# Altium PCB SD171-6.0PCB4.PcbDoc (part 2 of 11)
Units mil, origin at the board's own origin, x right, y up, seen from the top; angles counter-clockwise.
Board outline 5995 x 3921.26 mil, 6 copper layers (Top Layer, GND, Mid-Layer 1, Mid-Layer 2, VCC, Bottom Layer); 477 components, 539 nets, 2143 pads, 1050 vias.
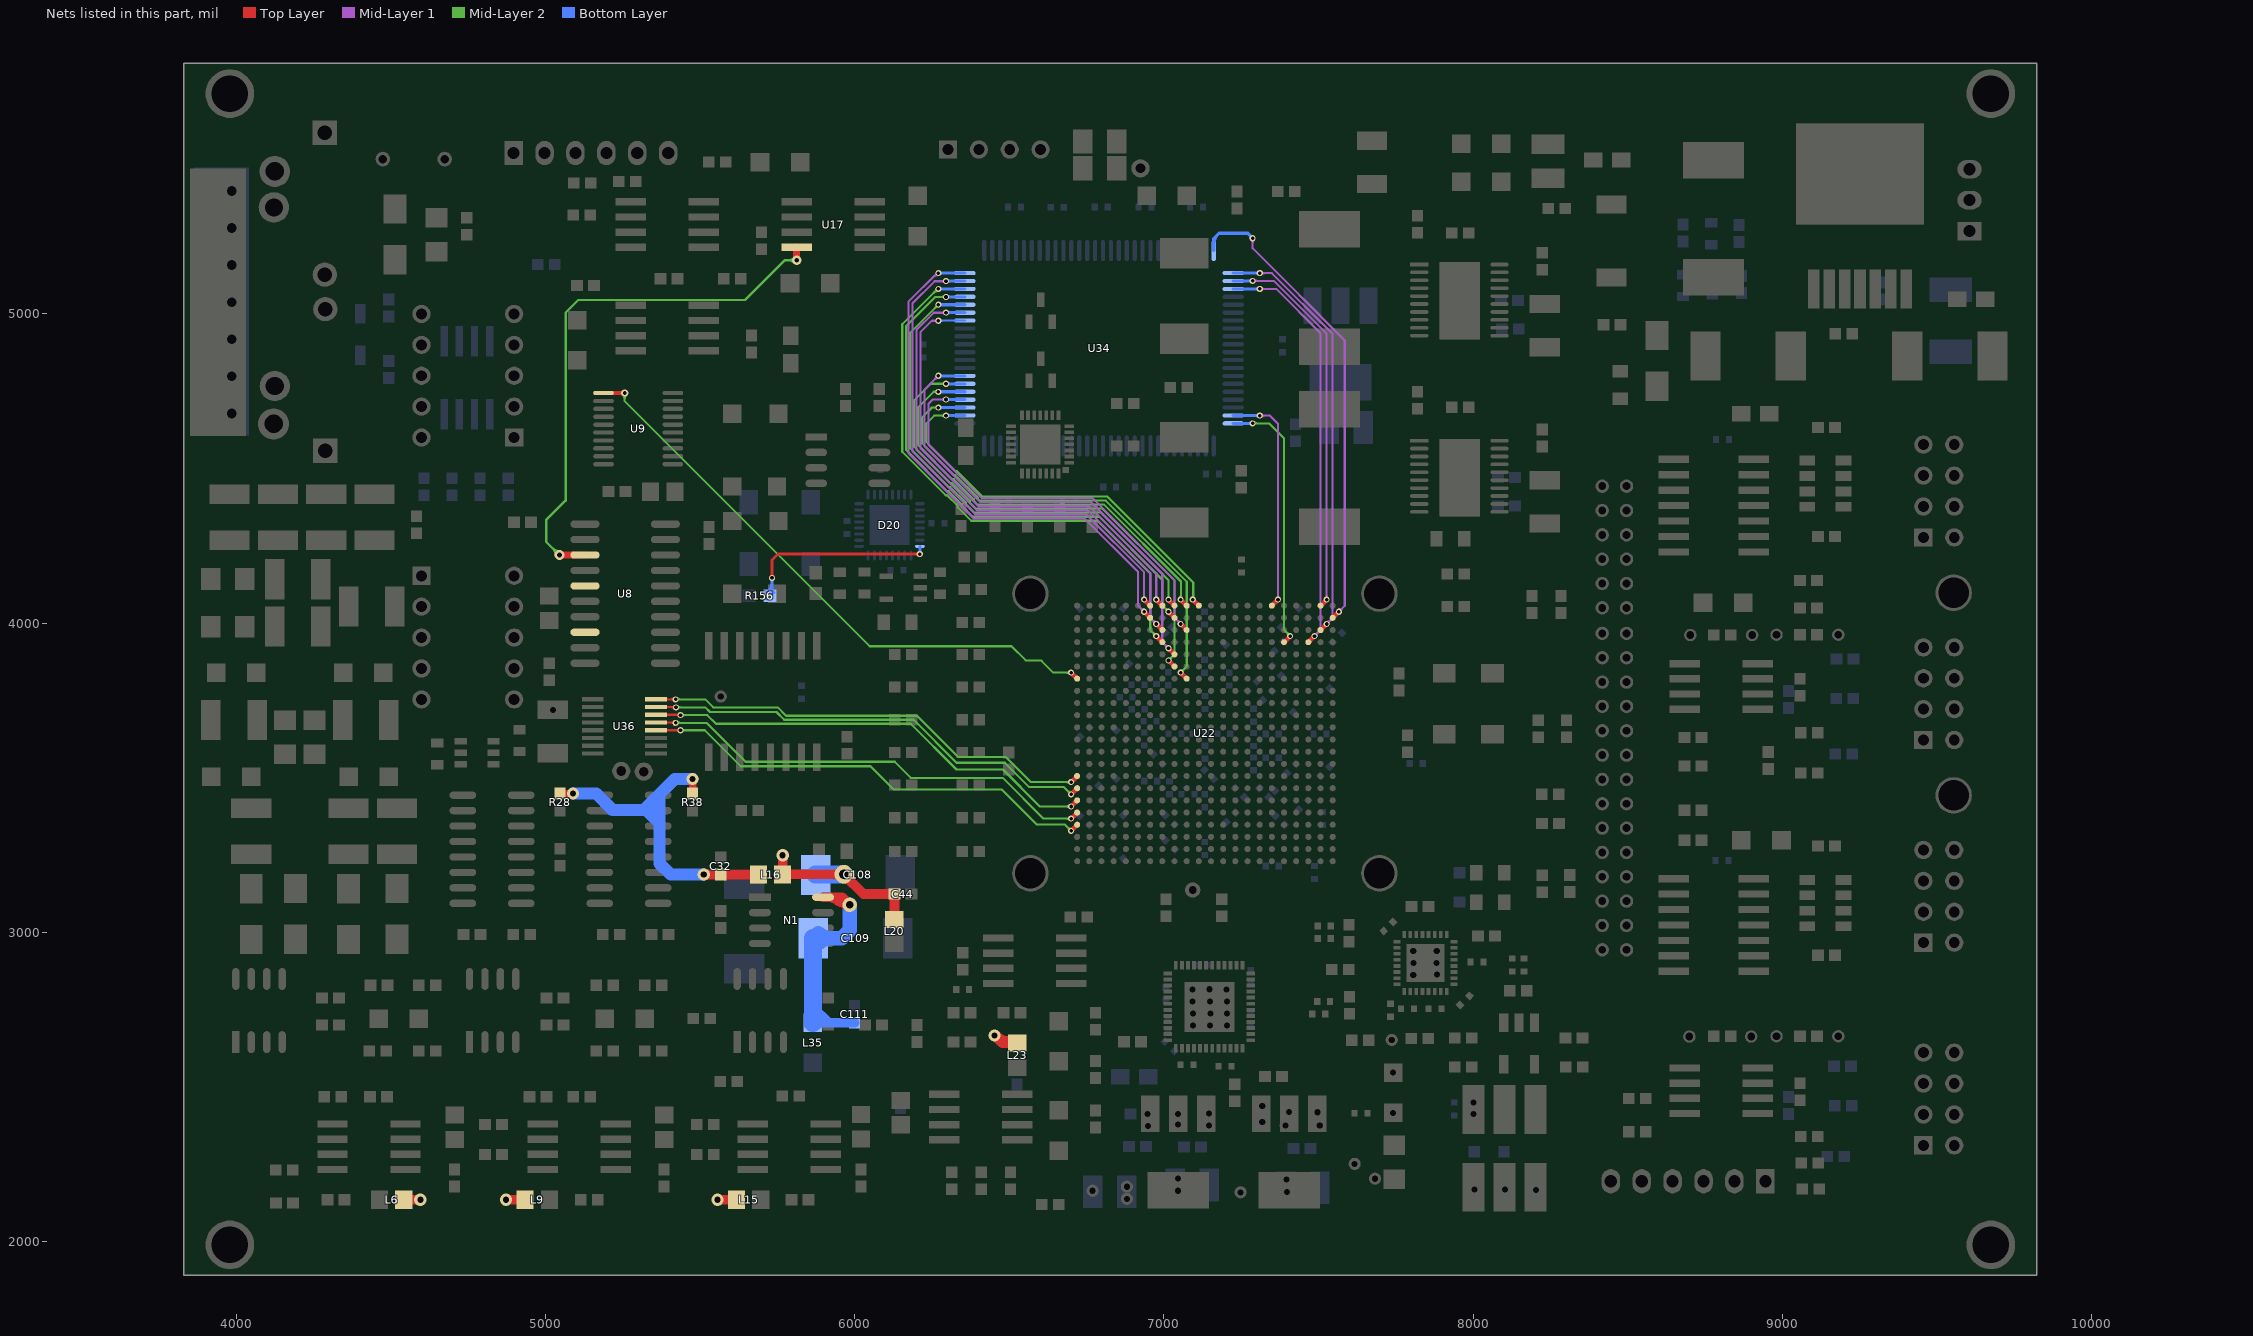
[diagram p6: the nets of this part, all layers, seen from the top]

## Footprints (in the part's own frame and the unit in brackets; to place one, negate y for a bottom-side part, rotate by r counter-clockwise, add the part's x,y. Pads: shape width x height; smd on the part's side, far side on the other; paste and mask are expansions set on the pad) (continued)
MTC20_N [mm] "TSOP, 20-Leads, Body 6.5x4.4mm, Pitch 0.65mm, IPC Medium Density"
  oval 1.7x0.35 smd: 1(-2.85,2.925) 2(-2.85,2.275) 3(-2.85,1.625) 4(-2.85,0.975) 5(-2.85,0.325) 6(-2.85,-0.325) 7(-2.85,-0.975) 8(-2.85,-1.625) 9(-2.85,-2.275) 10(-2.85,-2.925) 11(2.85,-2.925) 12(2.85,-2.275) 13(2.85,-1.625) 14(2.85,-0.975) 15(2.85,-0.325) 16(2.85,0.325) 17(2.85,0.975) 18(2.85,1.625) 19(2.85,2.275) 20(2.85,2.925)
  silkscreen extent -2.98,-3.3 1.6,3.77, body extent -2.25,-3.3 2.25,3.3, height 1.1
N10A [mm] "DIP; 10 Leads; Row Spacing 7.62 mm; Pitch 2.54 mm"
  rect 1.5x1.5 hole 0.9: 1(-3.81,5.08)
  round 1.5 hole 0.9: 2(-3.81,2.54) 3(-3.81,0) 4(-3.81,-2.54) 5(-3.81,-5.08) 6(3.81,-5.08) 7(3.81,-2.54) 8(3.81,0) 9(3.81,2.54) 10(3.81,5.08)
  silkscreen extent -3.94,-7.25 2.65,7.25, body extent -3.25,-7.25 3.25,7.25, height 5.08
NS020_N [mm] "20-Pin Small Outline Package 1.27 mm Pitch, IPC Medium Density"
  oval 2.4x0.6 smd: 1(-3.3,5.715) 2(-3.3,4.445) 3(-3.3,3.175) 4(-3.3,1.905) 5(-3.3,0.635) 6(-3.3,-0.635) 7(-3.3,-1.905) 8(-3.3,-3.175) 9(-3.3,-4.445) 10(-3.3,-5.715) 11(3.3,-5.715) 12(3.3,-4.445) 13(3.3,-3.175) 14(3.3,-1.905) 15(3.3,-0.635) 16(3.3,0.635) 17(3.3,1.905) 18(3.3,3.175) 19(3.3,4.445) 20(3.3,5.715)
  silkscreen extent -3.42,-6.45 1.7,6.69, body extent -2.8,-6.45 2.8,6.45, height 2
OPT [mm]
  rect 1.5x1.5 hole 0.9: 1(3.81,1.27)
  round 1.5 hole 0.9: 2(1.27,1.27) 3(-1.27,1.27) 4(-3.81,1.27) 5(-3.81,-1.27) 6(-1.27,-1.27) 7(1.27,-1.27) 8(3.81,-1.27)
  silkscreen extent -6.35,-22.12 6.35,5.08
PIN1 [mm] "Connector; Plug"
  round 2.5 hole 1.5: 1(0,0)
  silkscreen extent -1.4,-1.4 1.4,2.17
PIN-W2/E2.8 [mm] "Thru-Hole; 2 Leads"
  rect 2x2 hole 1.2: 1(-5.825,0)
  round 2 hole 1.2: 2(5.825,0)
  silkscreen extent -2.65,-1.4 2.65,1.4
QFG32_N [mm] "QFN, 32-Leads, Body 5x5mm, Pitch 0.5mm, IPC Medium Density"
  oval 0.8x0.25 smd: 1(-2.5,1.75) 2(-2.5,1.25) 3(-2.5,0.75) 4(-2.5,0.25) 5(-2.5,-0.25) 6(-2.5,-0.75) 7(-2.5,-1.25) 8(-2.5,-1.75) 17(2.5,-1.75) 18(2.5,-1.25) 19(2.5,-0.75) 20(2.5,-0.25) 21(2.5,0.25) 22(2.5,0.75) 23(2.5,1.25) 24(2.5,1.75)
  oval 0.25x0.8 smd: 9(-1.75,-2.5) 10(-1.25,-2.5) 11(-0.75,-2.5) 12(-0.25,-2.5) 13(0.25,-2.5) 14(0.75,-2.5) 15(1.25,-2.5) 16(1.75,-2.5) 25(1.75,2.5) 26(1.25,2.5) 27(0.75,2.5) 28(0.25,2.5) 29(-0.25,2.5) 30(-0.75,2.5) 31(-1.25,2.5) 32(-1.75,2.5)
  rect 3.3x3.3 smd: 33(0,0)
  silkscreen extent -3.58,-2.6 2.6,2.6, body extent -2.58,-2.58 2.58,2.58, height 1
QFP65P1680X2280-100N [mm] "100-Pin Quad Flat Pack Rectangular 0.65 mm Pitch"
  oval 1.75x0.35 smd: 1(-8.025,9.425) 2(-8.025,8.775) 3(-8.025,8.125) 4(-8.025,7.475) 5(-8.025,6.825) 6(-8.025,6.175) 7(-8.025,5.525) 8(-8.025,4.875) 9(-8.025,4.225) 10(-8.025,3.575) 11(-8.025,2.925) 12(-8.025,2.275) 13(-8.025,1.625) 14(-8.025,0.975) 15(-8.025,0.325) 16(-8.025,-0.325) 17(-8.025,-0.975) 18(-8.025,-1.625) 19(-8.025,-2.275) 20(-8.025,-2.925) 21(-8.025,-3.575) 22(-8.025,-4.225) 23(-8.025,-4.875) 24(-8.025,-5.525) 25(-8.025,-6.175) 26(-8.025,-6.825) 27(-8.025,-7.475) 28(-8.025,-8.125) 29(-8.025,-8.775) 30(-8.025,-9.425) 51(8.025,-9.425) 52(8.025,-8.775) 53(8.025,-8.125) 54(8.025,-7.475) 55(8.025,-6.825) 56(8.025,-6.175) 57(8.025,-5.525) 58(8.025,-4.875) 59(8.025,-4.225) 60(8.025,-3.575) 61(8.025,-2.925) 62(8.025,-2.275) 63(8.025,-1.625) 64(8.025,-0.975) 65(8.025,-0.325) 66(8.025,0.325) 67(8.025,0.975) 68(8.025,1.625) 69(8.025,2.275) 70(8.025,2.925) 71(8.025,3.575) 72(8.025,4.225) 73(8.025,4.875) 74(8.025,5.525) 75(8.025,6.175) 76(8.025,6.825) 77(8.025,7.475) 78(8.025,8.125) 79(8.025,8.775) 80(8.025,9.425)
  oval 0.35x1.75 smd: 31(-6.175,-11.025) 32(-5.525,-11.025) 33(-4.875,-11.025) 34(-4.225,-11.025) 35(-3.575,-11.025) 36(-2.925,-11.025) 37(-2.275,-11.025) 38(-1.625,-11.025) 39(-0.975,-11.025) 40(-0.325,-11.025) 41(0.325,-11.025) 42(0.975,-11.025) 43(1.625,-11.025) 44(2.275,-11.025) 45(2.925,-11.025) 46(3.575,-11.025) 47(4.225,-11.025) 48(4.875,-11.025) 49(5.525,-11.025) 50(6.175,-11.025) 81(6.175,11.025) 82(5.525,11.025) 83(4.875,11.025) 84(4.225,11.025) 85(3.575,11.025) 86(2.925,11.025) 87(2.275,11.025) 88(1.625,11.025) 89(0.975,11.025) 90(0.325,11.025) 91(-0.325,11.025) 92(-0.975,11.025) 93(-1.625,11.025) 94(-2.275,11.025) 95(-2.925,11.025) 96(-3.575,11.025) 97(-4.225,11.025) 98(-4.875,11.025) 99(-5.525,11.025) 100(-6.175,11.025)
  silkscreen extent -8.15,-9.75 6.75,10.33, body extent -7,-10 7,10, height 3.05
RAD-0.2 [mm] "Radial Cap, Thru-Hole; 2 Leads; 0.2 in Pin Spacing"
  round 1.2 hole 0.7: 1(-2.54,0) 2(2.54,0)
  silkscreen extent -4.44,-1.91 4.44,1.91
RESETKEY [mm]
  rect 1.5x1.5 smd: 0(0,3.937) 0(5.969,0.127) 1(0,0.254) 2(5.969,3.937)
  silkscreen extent 0,0 5.97,4.06
RNS001 [mil]
  rect 32x51 smd: 1(-75,-59) 2(-25,-59) 3(25,-59) 4(75,-59) 5(75,59) 6(25,59) 7(-25,59) 8(-75,59)
  silkscreen extent -122,-61 100,25
SIP3X [mm]
  rect 1.524x2 hole 1: 1(-0.002,0.02)
  oval 1.524x2 hole 1: 2(2.538,0.02) 3(5.078,0.02)
  silkscreen extent -2.54,-2.52 7.62,3.07
SIP6X [mm]
  rect 1.524x2 hole 1: 1(-0.023,0.014)
  oval 1.524x2 hole 1: 2(2.517,0.014) 3(5.057,0.014) 4(7.597,0.014) 5(10.137,0.014) 6(12.677,0.014)
  silkscreen extent -2.56,-2.02 15.22,3.57
SM-22 [mil]
  rect 30x60 smd mask+4: 1(100,0) 2(50,0) 3(0,0) 4(0,135.16) 5(100,135.16)
  silkscreen extent -50,-50 150,185
SMC [mm] "DO-214-AB/SMC; 2 C-Bend Leads; Body 7.9 x 5.9 mm, inc. leads (LxW)"
  rect 2.4x3.3 smd: 1(3.475,0) 2(-3.475,0)
  silkscreen extent -5.07,-2.05 5.43,2.05
SMD8XX [mm]
  rect 2.5x0.6 smd: 1(1.153,4.448) 2(1.153,3.198) 3(1.153,1.948) 4(1.153,0.698) 5(7.153,0.698) 6(7.153,1.948) 7(7.153,3.198) 8(7.153,4.448)
  silkscreen extent 2.93,0 5.34,5.08
SMD14X [mm]
  rect 2.5x0.6 smd: 1(0,0) 2(0,-1.27) 3(0,-2.54) 4(0,-3.81) 5(0,-5.08) 6(0,-6.35) 7(0,-7.62) 8(6.6,-7.62) 9(6.6,-6.35) 10(6.6,-5.08) 11(6.6,-3.81) 12(6.6,-2.54) 13(6.6,-1.27) 14(6.6,0)
  silkscreen extent 1.52,-8.25 5.08,0.64
so_8 [mm]
  rect 1.8x0.6 smd: 1(0,0)
  oval 1.8x0.6 smd: 2(0,-1.27) 3(0,-2.54) 4(0,-3.81) 5(5.188,-3.81) 6(5.188,-2.54) 7(5.188,-1.27) 8(5.188,0)
  silkscreen extent 1.32,-4.44 3.86,0.64
SOIC16 [mm]
  rect 0.6x2.25 smd: 1(0,0) 2(1.27,0) 3(2.54,0) 4(3.81,0) 5(5.08,0) 6(6.35,0) 7(7.62,0) 8(8.89,0) 9(8.89,9.15) 10(7.62,9.15) 11(6.35,9.15) 12(5.08,9.15) 13(3.81,9.15) 14(2.54,9.15) 15(1.27,9.15) 16(0,9.15)
  silkscreen extent -0.98,-0.12 9.72,7.63
SOP16X [mm]
  rect 1.8x0.35 smd: 1(0,0) 2(0,-0.635) 3(0,-1.27) 4(0,-1.905) 5(0,-2.54) 6(0,-3.175) 7(0,-3.81) 8(0,-4.445) 9(5.2,-4.445) 10(5.2,-3.81) 11(5.2,-3.175) 12(5.2,-2.54) 13(5.2,-1.905) 14(5.2,-1.27) 15(5.2,-0.635) 16(5.2,0)
  silkscreen extent 1.27,-4.83 3.81,0.25
SOP20 [mm]
  rect 1.5x0.3 smd: 1(0,0)
  oval 1.5x0.3 smd: 2(0,-0.65) 3(0,-1.3) 4(0,-1.95) 5(0,-2.6) 6(0,-3.25) 7(0,-3.9) 8(0,-4.55) 9(0,-5.2) 10(0,-5.85) 11(6.6,-5.85) 12(6.6,-5.2) 13(6.6,-4.55) 14(6.6,-3.9) 15(6.6,-3.25) 16(6.6,-2.6) 17(6.6,-1.95) 18(6.6,-1.3) 19(6.6,-0.65) 20(6.6,0)
  silkscreen extent 1.58,-6.18 5.02,0.33
SOT23-3L [mm] "SOT23, 3-Leads, Body 2.9x1.3mm, Pitch 0.95mm, Lead Span 2.5mm, IPC High Density"
  rect 1.2x0.6 smd: 1(-0.9,0.95) 2(-0.9,-0.95) 3(0.9,0)
  silkscreen extent -1.02,-1.5 0.7,1.92, body extent -0.7,-1.5 0.7,1.5, height 1.1
SOT23-6 [mm]
  rect 0.55x1 smd: 1(-0.95,-1.35) 2(0,-1.35) 3(0.95,-1.35) 4(0.95,1.35) 5(0,1.35) 6(-0.95,1.35)
  silkscreen extent -1.52,-0.76 1.52,0.76
SOT-223 [mm]
  rect 1.5x3 smd: 1(-2.3,-4.3) 2(0,-4.3) 3(2.3,-4.3)
  rect 5.08x3 smd: 4(0,2)
  silkscreen extent -3.8,-3.6 3.8,0
TS7B_N [mm] "D2-PAK, 8-Leads, Body 8.6x10.2mm, Pitch 1.27mm, Lead Span 14.1mm, IPC Medium Density"
  rect 3.2x0.95 smd: 1(-6,3.81) 2(-6,2.54) 3(-6,1.27) 4(-6,0) 5(-6,-1.27) 6(-6,-2.54) 7(-6,-3.81)
  rect 8.3x10.5 smd: 8(3.45,0)
  silkscreen extent -6.12,-5.2 -1.1,5.2, body extent -3.35,-5.2 6.05,5.2, height 4.64
XTALSMD [mil]
  rect 74x60 smd: 1(0,0) 2(0,-197) 3(156,-197) 4(156,0)
  silkscreen extent -60,-250 216,53

## Part data
C1 C2 C5 C6 C7 C8 C9 C10 C11 C12 C13 C14 C15 C16 C18 C21 C22 C23 C24 C25 C26 C27 C28 C30 C31 C32 C33 C35 C38 C39 C41 C42 C43 C44 C45 C47 C48 C50 C51 C52 C53 C55 C60 C61 C62 C63 C64 C72 C73 C82 C85 C86 C89 C92 C93 C98 C99 C102 C106 C110 C111 C112 C113 C114 C115 C116 C117 C118 C119 C120 C121 C122 C123 C124 C125 C126 C127 C128 C129 C130 C131 C132 C133 C134 C135 C136 C137 C138 C139 C140 C141 C142 C143 C144 C145 C146 C147 C148 C149 C150 C151 C152 C153 C154 C155 C156 C157 C159 C160 C161 C162 C164 C165 C166 C167 C168 C169 C170 C171 C172 C173 C174 C175 C176 C177 C178 C179 C180 C181 C182 C183 C184 C185 C186 C187 C188 C189 C190 C191 C192 C193 C194 C195 C196 C197 C198 C199 C200 C201 C204 C205 C206 C207 C208 C209 C210 C211 C215 C216: library part Cap, "Capacitor"
C19 C20 C34 C36 C37 C87 C90 C94 C95 C96 C97 C100 C101 C212: library part "Cap Semi", "Capacitor (Semiconductor SIM Model)"
C46: library part ELECTRO1
C49 C56 C58 C59 C65 C70 C71 C74 C75 C76 C78 C80 C83 C91 C103 C105 C158 C163 C202 C203 C214 C228: library part CAP, "Capacitor"
C54 C57 C79 C81: library part CAPACITOR, "Capacitor"
C66 C67 C69 C213 C229: library part ELECTRO1, "Electrolytic Capacitor"
C68 C77: library part "Cap Pol1", "Polarized Capacitor (Radial)"
C84 C88 C104 C220: library part CAP+
C107 C108 C109: library part "Capcitor polarity"
C218 C219 C221 C222 C223 C224 C225 C226 C227: library part 2543.S01_104_49
D1 D2 D3 D4 D5 D6: library part Diode, "Default Diode"
D8 D10 D13 D14 D15 D16: library part LED0, "Typical INFRARED GaAs LED"
D9: library part LED2, "Typical RED, GREEN, YELLOW, AMBER GaAs LED"
D11 D12: library part BAV99, "Silicon Switching Diode Array for High-Speed Switching"
D18: library part MAX823, "MAX823复位监控芯片"
D20: library part XC2C32A-6QFG32C, "CoolRunner-II 1.8V, 32 Macrocell CPLD, 21 User I/Os, 32-Pin QFNL, Commercial Grade, Pb-Free"
J3 J4 J5: library part "Header 6", "Header, 6-Pin"
L1 L2 L3 L4 L5 L6 L7 L9 L10 L11 L12 L13 L14 L15 L16 L17 L18 L19 L21 L22 L23 L24 L25 L26 L27 L29 L30 L31 L32 L33 L34 L35: library part Inductor, "Inductor"
L20: library part Inductor
L28: library part INDUCTOR1
N1: library part LM2660
N2 N5: library part LM1117, "LM1117MPX-3.3(NSC)"
N3: "SIMPLE SWITCHER High Efficiency 3A Step-Down Voltage Regulator"
N4: library part LM1117
O1 O3: library part HFBR-1414
O2 O4: library part OPTO
P1: library part "Header 3", "Header, 3-Pin"
P5: library part MHDR2X20, "Header, 20-Pin, Dual row"
Q1 Q2: library part Triac, "Silicon Bidirectional Triode Thyristor"
R1 R3 R4 R5 R7 R8 R9 R12 R13 R14 R15 R16 R17 R18 R19 R20 R21 R22 R23 R24 R26 R27 R28 R29 R30 R31 R32 R33 R34 R35 R36 R37 R38 R39 R40 R41 R43 R45 R46 R47 R48 R49 R50 R51 R53 R55 R56 R58 R60 R61 R62 R63 R64 R65 R66 R67 R68 R69 R70 R71 R72 R74 R75 R77 R78 R80 R81 R85 R86 R87 R88 R89 R90 R92 R93 R94 R95 R96 R97 R98 R99 R100 R101 R102 R103 R104 R105 R106 R115 R116 R118 R119 R120 R121 R122 R123 R132 R133 R134 R135 R136 R137 R138 R139 R140 R141 R142 R143 R146 R151 R152 R153 R154 R155: library part Res2, "Resistor"
R42 R44: library part Resistor
R73 R76 R79 R156 R157 R158 R159 RT1: library part RES2
R107 R108 R109 R110 R111 R112 R113 R114 R117 R124 R125 R126 R127 R128 R129 R130 R131: library part Res3, "Resistor"
R149 R150: library part RES2, "电阻"
RN1 RN2: library part "SW DIP-4", "DIP Switch, 4 Position, SPST"
SW1 SW2: library part SW-PB, "Switch"
T1: library part ETC1_1_13
U1 U6 U15: library part "MCL MSW-2"
U2 U7 U16: library part AD847AQ, "High-Speed, Low-Power Monolithic Operational Amplifier"
U3 U4: library part TQ2SA
U5 U11: library part 74VHC4053M, "Triple 2-Channnel Analog Multiplexer"
U8: "Octal Bus Transceiver with 3-State Outputs"
U9: "Octal Latch with 3-State Output"
U12: library part OP07AJ, "Ultra-Low Offset Voltage Operational Amplifier"
U13: library part REF01AJ, "+10V Precision Voltage Reference"
U14: library part "SPI FLASH 128Mb S25FL128P", "SPI FLASH 128Mbit, 104MHz, 64kB sector"
U17: library part ads1251
U20: library part AD8138
U21: library part RF2906(28), "433MHZ PSK/FM/AM/Data Transceiver"
U22: library part XC6SLX45-L1FGG484I, "Spartan-6 LX 1.0V FPGA, 316 User I/Os, 484-Ball Fine-Pitch BGA (1.0mm Pitch), Low Power Version, Industrial Grade, Pb-Free"
U23: library part AD9246
U24: library part AD9515
U25: library part TPS54312, "TPS54312"
U28: library part "OSC LVPECL"
U29 U30: "Quadruple 2-Input Positive-NAND Gate"
U31 U32 U33: library part ICL7650BCSA-1, "Chopper Stabilized Operational Amplifier"
U34: library part GS880Z18BT100
U38: library part CRYSTAL
X1: library part "TCXO 20MHz Rakon E5249LF 5x3.2", "TCXO, 20MHz, 100ppb, 5x3.2mm SMT, clipped sine o/p"
Z1: library part Diode_type1

## Free pads (board coordinates)
  rect 181.1x866.14 smd: 0(3939,5038)
  rect 180x866.14 smd far side: 0(3950,5040)
  round 100 hole 60: 0(4123,5461) 1(4119,4644)
  round 39.37 hole 19.68: 0(5023,3719) 0(5566,3762) 0(6769,2163) 0(6880,2137) 0(6880,2176.12) 0(6947,2411) 0(6948.82,2372) 0(7046,2163) 0(7046,2203) 0(7046,2377) 0(7046,2411) 0(7092,2814) 0(7093,2776) 0(7094,2698) 0(7094,2737) 0(7146.12,2374) 0(7146.12,2412.88) 0(7148,2815) 0(7149,2698) 0(7149,2776) 0(7150,2737) 0(7203,2814) 0(7204,2698) 0(7204,2737) 0(7204,2775) 0(7248,2158) 0(7318,2385) 0(7318,2437) 0(7393.88,2374) 0(7396.88,2200) 0(7398,2159) 0(7404,2418) 0(7497,2417) 0(7504.12,2374) 0(7617,2250) 0(7683,2202) 0(7737,2651) 0(7741,2414) 0(7741,2545) 0(7806.5,2860.5) 0(7806.64,2939.36) 0(7807,2900) 0(7882,2900) 0(7882.64,2939) 0(7883.25,2862.75) 0(8001,2412) 0(8001,2449) 0(8005,2167) 0(8103,2167) 0(8204,2166)
  round 59.06 hole 31.5: 0(5244,3521) 0(5317,3519) 0(6924,5471) 1(3984,4678) 1(3984,4798) 1(3984,4918) 1(3984,5038) 1(3984,5158) 1(3984,5278) 1(3984,5398)
  round 47.24 hole 23.62: 0(5983,3088)
  round 118.11 hole 98.43: 0(6568,3190.23) 0(6568,4095) 0(7697.23,3190.23) 0(7697.23,4095) 0(9555,3442.33) 0(9555,4098)
  round 50 hole 25: 0(7092.8,3136.1)
  rect 130x250 smd: 0(7957,4470) 0(7957,5043)
  rect 130x250 smd far side: 0(7957,4470) 0(7957,5043)
  round 40 hole 25: 0(8903,3961) 0(9182,2663) 0(9182,3962) 1(8703,3961) 1(8982,2663) 1(8982,3962) 2(8900,2662) 3(8700,2662)
  rect 413.39x326.77 smd far side: 0(9251.02,5452.84)
  round 157.48 hole 118.11 unplated: 1(3977.54,1988.19) 1(3977.54,5712.6) 1(9675.46,1988.19) 1(9675.46,5712.6)

## Via types
v1: diameter 19.68, hole 11.81, Top Layer to Bottom Layer, 521 vias
v2: diameter 50, hole 25, Top Layer to Bottom Layer, 162 vias
v3: diameter 30, hole 15, Top Layer to Bottom Layer, 100 vias
v4: diameter 39.37, hole 19.68, Top Layer to Bottom Layer, 74 vias
v5: diameter 31.5, hole 15.75, Top Layer to Bottom Layer, 44 vias
v6: diameter 40, hole 20, Top Layer to Bottom Layer, 38 vias
v7: diameter 24, hole 12, Top Layer to Bottom Layer, 33 vias
v8: diameter 47.24, hole 23.62, Top Layer to Bottom Layer, 24 vias
v9: diameter 59.06, hole 31.5, Top Layer to Bottom Layer, 10 vias
v10: diameter 60, hole 30, Top Layer to Bottom Layer, 9 vias
v11: diameter 25.98, hole 12.99, Top Layer to Bottom Layer, tented top, 9 vias
v12: diameter 23.62, hole 11.81, Top Layer to Bottom Layer, 8 vias
v13: diameter 20, hole 12, Top Layer to Bottom Layer, 6 vias
v14: diameter 50, hole 27.56, Top Layer to Bottom Layer, 4 vias
v15: diameter 51.18, hole 27.56, Top Layer to Bottom Layer, 2 vias
v16: diameter 39.37, hole 23.62, Top Layer to Bottom Layer, 2 vias
v17: diameter 80, hole 40, Top Layer to Bottom Layer, 1 vias
v18: diameter 47.24, hole 19.68, Top Layer to Bottom Layer, 1 vias
v19: diameter 47.24, hole 27.56, Top Layer to Bottom Layer, 1 vias
v20: diameter 22.05, hole 11.81, Top Layer to Bottom Layer, 1 vias

## Nets (pads, with @x,y where several pads share a name; then routed paths per layer and width w, separated by ;. In a path a pad name is that pad's centre, name@x,y a point inside that pad or via, vN(x,y) a via of type N, cw(c..) or ccw(c..) an arc to the next point about the centre after c; other vN are vias at no path point)
30.000M: D20.8 R156.2 | length 786.7
  Top Layer w10: v1@5728.58,4149.42 ccw(c5720.31,4157.69) 5732,4157.69 ccw(c5743.69,4157.69) v1@5735.42,4149.42 ; v1@5733,4147 v1(5732,4146) 5732,4204 5751,4223 v1(6210,4223) ; v1@6206.58,4219.58 ccw(c6198.31,4211.31) 6198.31,4223 ccw(c6198.31,4234.69) v1@6206.58,4226.42
  Bottom Layer w10: R156.2@5716.39,4098.61 ccw(c5678.72,4136.28) v1@5732,4136.28 ; R156.2@5723.46,4091.54 ccw(c5702.86,4112.14) 5732,4112.14 ccw(c5751.14,4112.14) R156.2@5737.61,4098.61 ; R156.2@5725.5,4088 R156.2@5735,4097.5 ; v1@5728.58,4142.58 cw(c5720.31,4134.31) 5732,4134.31 cw(c5743.69,4134.31) v1@5735.42,4142.58 ; R156.2@5732,4096.5 v1(5732,4146) ; v1@6206.58,4226.42 ccw(c6197.28,4235.72) 6210.43,4235.72 ; v1(6210,4223) 6210.43,4223.43 D20.8@6210.43,4248.1 ; 6210.43,4233.66 ccw(c6220.66,4233.66) v1@6213.42,4226.42
#LDAC: U8.18
#SYNC: U8.15
-5V: C32.1 L16.2 R28.1 R38.1 | length 1241.7
  Top Layer w23.62: R28.1@5046,3448 v4(5088,3448) ; R38.1@5475,3448 v4(5475,3495)
  Top Layer w31.5: v4(5511,3186) C32.1@5566,3186 L16.2@5687.63,3186 ; 5659.12,3186 ccw(c5659.12,3214.51) 5679.28,3194.35 cw(c5659.12,3214.51) 5659.12,3186 ; 5659.12,3186 cw(c5659.12,3157.49) 5679.28,3177.65 ccw(c5659.12,3157.49) 5659.12,3186
  Bottom Layer w39.37: v4(5088,3448) 5163,3448 5216,3395 5317,3395 5368,3446 ; 5325,3395 5368,3352 5368,3446 ; 5368,3344 5368,3222 5404,3186 v4(5511,3186) ; 5369,3447 5368,3446 ; v4(5475,3495) 5417,3495 5368,3446
A0: U22.P5 U34.37 | length 1750.8
  Top Layer w15: v1(7014.5,3918.21) U22.P5@7034.19,3898.52
  Mid-Layer 1 w7: v1(6270,4800) 6225,4755 6225,4571.54 6405.54,4391 6763.85,4391 6994.48,4160.37 6994.48,3938.23 v1(7014.5,3918.21) ; 6259.17,4789.17 cw(c6270,4778.35) v1@6270,4793.66 ; 6259.17,4789.17 ccw(c6248.35,4800) v1@6263.66,4800 ; 6259.17,4789.17 cw(c6270,4778.35) v1@6270,4793.66 ; 6259.17,4789.17 ccw(c6248.35,4800) v1@6263.66,4800 ; 6259.17,4789.17 ccw(c6248.35,4800) v1@6263.66,4800 ; 6259.17,4789.17 cw(c6270,4778.35) v1@6270,4793.66 ; 7003.68,3929.03 cw(c6992.85,3918.21) v1@7008.16,3918.21 ; 7003.68,3929.03 ccw(c7014.5,3939.86) v1@7014.5,3924.55 ; 7003.68,3929.03 cw(c6992.85,3918.21) v1@7008.16,3918.21 ; 7003.68,3929.03 ccw(c7014.5,3939.86) v1@7014.5,3924.55 ; 7003.68,3929.03 ccw(c7014.5,3939.86) v1@7014.5,3924.55 ; 7003.68,3929.03 cw(c6992.85,3918.21) v1@7008.16,3918.21
  Bottom Layer w10: v1(6270,4800) 6270.57,4799.43 U34.37@6355.94,4799.43 ; v1@6273.42,4796.58 cw(c6280.32,4789.68) 6280.32,4799.43 ; v1@6273.42,4796.58 cw(c6280.32,4789.68) 6280.32,4799.43 ; v1@6273.42,4796.58 cw(c6280.32,4789.68) 6280.32,4799.43 ; v1@6273.42,4803.42 ccw(c6283.06,4813.06) 6283.06,4799.43 ; v1@6273.42,4803.42 ccw(c6283.06,4813.06) 6283.06,4799.43 ; v1@6273.42,4803.42 ccw(c6283.06,4813.06) 6283.06,4799.43
A1: U22.P6 U34.36 | length 1854.7
  Top Layer w15: v1(7014.5,3878.84) U22.P6@7034.19,3859.15
  Mid-Layer 2 w7: v1(6295,4774) 6245,4774 6192,4721 6192,4570.31 6309.8,4452.51 6314.4,4452.51 6371.51,4395.4 6371.51,4390.8 6392.31,4370 6800.92,4370 7034.53,4136.39 7034.53,3898.86 v1(7014.5,3878.84) ; 6279.69,4774 cw(c6279.69,4758.69) v1@6290.52,4769.52 ; 6279.69,4774 ccw(c6279.69,4789.31) v1@6290.52,4778.48 ; 6279.69,4774 cw(c6279.69,4758.69) v1@6290.52,4769.52 ; 6279.69,4774 ccw(c6279.69,4789.31) v1@6290.52,4778.48 ; 6279.69,4774 ccw(c6279.69,4789.31) v1@6290.52,4778.48 ; 6279.69,4774 cw(c6279.69,4758.69) v1@6290.52,4769.52 ; v1@7014.5,3885.18 ccw(c7014.5,3900.49) 7025.33,3889.66 ; v1@7014.5,3885.18 ccw(c7014.5,3900.49) 7025.33,3889.66 ; v1@7014.5,3885.18 ccw(c7014.5,3900.49) 7025.33,3889.66 ; v1@7020.85,3878.84 cw(c7036.16,3878.84) 7025.33,3889.66 ; v1@7020.85,3878.84 cw(c7036.16,3878.84) 7025.33,3889.66 ; v1@7020.85,3878.84 cw(c7036.16,3878.84) 7025.33,3889.66
  Bottom Layer w10: v1(6295,4774) 6295.16,4773.84 U34.36@6355.94,4773.84 ; v1@6298.42,4770.58 cw(c6306.31,4762.69) 6306.31,4773.84 ; v1@6298.42,4770.58 cw(c6306.31,4762.69) 6306.31,4773.84 ; v1@6298.42,4770.58 cw(c6306.31,4762.69) 6306.31,4773.84 ; v1@6298.42,4777.42 ccw(c6307.07,4786.07) 6307.07,4773.84 ; v1@6298.42,4777.42 ccw(c6307.07,4786.07) 6307.07,4773.84 ; v1@6298.42,4777.42 ccw(c6307.07,4786.07) 6307.07,4773.84
A2: U22.N1 U34.35 | length 1590.4
  Top Layer w15: v1(7053.87,4075.69) U22.N1@7073.56,4056
  Mid-Layer 2 w7: v1(6270,4748) 6255,4748 ; v1(7053.87,4075.69) 7055,4076.81 7055,4134.31 6806.31,4383 6397.69,4383 6384.51,4396.18 6384.51,4400.78 6319.78,4465.51 6315.18,4465.51 6205,4575.69 6205,4698 6255,4748 ; 6255,4748 cw(c6255,4733.44) 6265.45,4743.58 ccw(c6255,4733.44) 6255,4748 ; 6255,4748 ccw(c6255,4762.56) 6265.45,4752.42 cw(c6255,4762.56) 6255,4748 ; v1@7049.39,4080.17 ccw(c7035.84,4093.72) 7055,4093.72 ; v1@7049.39,4080.17 ccw(c7035.84,4093.72) 7055,4093.72 ; v1@7049.39,4080.17 ccw(c7035.84,4093.72) 7055,4093.72 ; 7055,4088.28 ccw(c7066.47,4088.28) v1@7058.36,4080.17 ; 7055,4088.28 ccw(c7066.47,4088.28) v1@7058.36,4080.17 ; 7055,4088.28 ccw(c7066.47,4088.28) v1@7058.36,4080.17
  Bottom Layer w10: v1(6270,4748) 6270.25,4748.25 U34.35@6355.94,4748.25 ; v1@6273.42,4744.58 cw(c6282.3,4735.7) 6282.3,4748.25 ; v1@6273.42,4744.58 cw(c6282.3,4735.7) 6282.3,4748.25 ; v1@6273.42,4744.58 cw(c6282.3,4735.7) 6282.3,4748.25 ; v1@6273.42,4751.42 ccw(c6281.08,4759.08) 6281.08,4748.25 ; v1@6273.42,4751.42 ccw(c6281.08,4759.08) 6281.08,4748.25 ; v1@6273.42,4751.42 ccw(c6281.08,4759.08) 6281.08,4748.25
A3: U22.N3 U34.34 | length 1611
  Top Layer w15: v1(7053.87,3996.95) U22.N3@7073.56,3977.26
  Mid-Layer 1 w7: v1(6295,4723) 6252,4723 6238,4709 6238,4576.92 6410.92,4404 6769.23,4404 7034.53,4138.7 7034.53,4016.97 7053.87,3997.63 v1(7053.87,3996.95) ; 6279.69,4723 cw(c6279.69,4707.69) v1@6290.52,4718.52 ; 6279.69,4723 ccw(c6279.69,4738.31) v1@6290.52,4727.48 ; 6279.69,4723 cw(c6279.69,4707.69) v1@6290.52,4718.52 ; 6279.69,4723 ccw(c6279.69,4738.31) v1@6290.52,4727.48 ; 6279.69,4723 ccw(c6279.69,4738.31) v1@6290.52,4727.48 ; 6279.69,4723 cw(c6279.69,4707.69) v1@6290.52,4718.52 ; 7042.56,4008.94 cw(c7030.57,3996.95) v1@7047.53,3996.95 ; 7042.56,4008.94 cw(c7030.57,3996.95) v1@7047.53,3996.95 ; 7042.56,4008.94 cw(c7030.57,3996.95) v1@7047.53,3996.95 ; 7044.22,4007.29 ccw(c7053.87,4016.95) v1@7053.87,4003.29 ; 7044.22,4007.29 ccw(c7053.87,4016.95) v1@7053.87,4003.29 ; 7044.22,4007.29 ccw(c7053.87,4016.95) v1@7053.87,4003.29
  Bottom Layer w10: v1(6295,4723) 6295.34,4722.66 U34.34@6355.94,4722.66 ; v1@6298.42,4719.58 cw(c6305.87,4712.13) 6305.87,4722.66 ; v1@6298.42,4719.58 cw(c6305.87,4712.13) 6305.87,4722.66 ; v1@6298.42,4719.58 cw(c6305.87,4712.13) 6305.87,4722.66 ; v1@6298.42,4726.42 ccw(c6307.51,4735.51) 6307.51,4722.66 ; v1@6298.42,4726.42 ccw(c6307.51,4735.51) 6307.51,4722.66 ; v1@6298.42,4726.42 ccw(c6307.51,4735.51) 6307.51,4722.66
A4: U22.N7 U34.33 | length 1809.1
  Top Layer w15: v1(7053.87,3839.47) U22.N7@7073.56,3819.78
  Mid-Layer 2 w7: v1(6270,4697) 6249.62,4697 6218,4665.38 6218,4581.08 6320.57,4478.51 6325.17,4478.51 6397.51,4406.17 6397.51,4401.57 6403.08,4396 6811.69,4396 7073.9,4133.79 7073.9,3859.49 v1(7053.87,3839.47) ; 6254.69,4697 cw(c6254.69,4681.69) v1@6265.52,4692.52 ; 6254.69,4697 ccw(c6254.69,4712.31) v1@6265.52,4701.48 ; 6254.69,4697 cw(c6254.69,4681.69) v1@6265.52,4692.52 ; 6254.69,4697 ccw(c6254.69,4712.31) v1@6265.52,4701.48 ; 6254.69,4697 ccw(c6254.69,4712.31) v1@6265.52,4701.48 ; 6254.69,4697 cw(c6254.69,4681.69) v1@6265.52,4692.52 ; v1@7053.87,3845.81 ccw(c7053.87,3861.12) 7064.7,3850.29 ; v1@7053.87,3845.81 ccw(c7053.87,3861.12) 7064.7,3850.29 ; v1@7053.87,3845.81 ccw(c7053.87,3861.12) 7064.7,3850.29 ; v1@7060.22,3839.47 cw(c7075.53,3839.47) 7064.7,3850.29 ; v1@7060.22,3839.47 cw(c7075.53,3839.47) 7064.7,3850.29 ; v1@7060.22,3839.47 cw(c7075.53,3839.47) 7064.7,3850.29
  Bottom Layer w10: v1(6270,4697) 6270.07,4697.07 U34.33@6355.94,4697.07 ; v1@6273.42,4693.58 cw(c6281.86,4685.14) 6281.86,4697.07 ; v1@6273.42,4693.58 cw(c6281.86,4685.14) 6281.86,4697.07 ; v1@6273.42,4693.58 cw(c6281.86,4685.14) 6281.86,4697.07 ; v1@6273.42,4700.42 ccw(c6281.52,4708.52) 6281.52,4697.07 ; v1@6273.42,4700.42 ccw(c6281.52,4708.52) 6281.52,4697.07 ; v1@6273.42,4700.42 ccw(c6281.52,4708.52) 6281.52,4697.07
A5: U22.M1 U34.32 | length 1528
  Top Layer w15: v1(7093.24,4075.69) U22.M1@7112.93,4056
  Mid-Layer 2 w7: v1(6295,4671) 6257,4671 6231,4645 6231,4586.46 6325.95,4491.51 6330.55,4491.51 6413.06,4409 6817.08,4409 7095,4131.08 v1@7095,4077.44 ; 6279.69,4671 cw(c6279.69,4655.69) v1@6290.52,4666.52 ; 6279.69,4671 ccw(c6279.69,4686.31) v1@6290.52,4675.48 ; 6279.69,4671 cw(c6279.69,4655.69) v1@6290.52,4666.52 ; 6279.69,4671 ccw(c6279.69,4686.31) v1@6290.52,4675.48 ; 6279.69,4671 ccw(c6279.69,4686.31) v1@6290.52,4675.48 ; 6279.69,4671 cw(c6279.69,4655.69) v1@6290.52,4666.52 ; v1@7088.76,4080.17 ccw(c7073.69,4095.24) 7095,4095.24 ; v1@7088.76,4080.17 ccw(c7073.69,4095.24) 7095,4095.24 ; v1@7088.76,4080.17 ccw(c7073.69,4095.24) 7095,4095.24 ; 7095,4086.76 ccw(c7104.32,4086.76) v1@7097.73,4080.17 ; 7095,4086.76 ccw(c7104.32,4086.76) v1@7097.73,4080.17 ; 7095,4086.76 ccw(c7104.32,4086.76) v1@7097.73,4080.17
  Bottom Layer w10: v1(6295,4671) 6295.48,4671.48 U34.32@6355.94,4671.48 ; v1@6298.42,4667.58 cw(c6307.85,4658.15) 6307.85,4671.48 ; v1@6298.42,4667.58 cw(c6307.85,4658.15) 6307.85,4671.48 ; v1@6298.42,4667.58 cw(c6307.85,4658.15) 6307.85,4671.48 ; v1@6298.42,4674.42 ccw(c6305.53,4681.53) 6305.53,4671.48 ; v1@6298.42,4674.42 ccw(c6305.53,4681.53) 6305.53,4671.48 ; v1@6298.42,4674.42 ccw(c6305.53,4681.53) 6305.53,4671.48
A6: U22.R1 U34.44 | length 1772.7
  Top Layer w15: v1(6975.13,4075.69) U22.R1@6994.82,4056
  Mid-Layer 1 w7: v1(6270,4978) 6249,4978 6212,4941 6212,4566.15 6400.15,4378 6758.46,4378 6975.13,4161.33 v1(6975.13,4075.69) ; 6254.69,4978 cw(c6254.69,4962.69) 6265.52,4973.52 ccw(c6254.69,4962.69) 6254.69,4978 ; 6254.69,4978 ccw(c6254.69,4993.31) 6265.52,4982.48 cw(c6254.69,4993.31) 6254.69,4978 ; v1@6970.65,4080.17 ccw(c6959.82,4091) 6975.13,4091 ; v1@6970.65,4080.17 ccw(c6959.82,4091) 6975.13,4091 ; v1@6970.65,4080.17 ccw(c6959.82,4091) 6975.13,4091 ; 6975.13,4091 ccw(c6990.44,4091) v1@6979.62,4080.17 ; 6975.13,4091 ccw(c6990.44,4091) v1@6979.62,4080.17 ; 6975.13,4091 ccw(c6990.44,4091) v1@6979.62,4080.17
  Bottom Layer w7: v1(6270,4978) 6270.57,4978.57 U34.44@6355.94,4978.57 ; 6320.2,4978.57 ccw(c6320.2,4986.75) 6325.99,4980.96 cw(c6320.2,4986.75) 6320.2,4978.57 ; 6320.2,4978.57 cw(c6320.2,4970.38) 6325.99,4976.17 ccw(c6320.2,4970.38) 6320.2,4978.57 ; v1@6274.48,4973.52 cw(c6286.68,4961.32) 6286.68,4978.57 ccw(c6286.68,4961.32) v1@6274.48,4973.52 ; v1@6274.48,4982.48 ccw(c6283.94,4991.94) 6283.94,4978.57 cw(c6283.94,4991.94) v1@6274.48,4982.48
A7: U22.R3 U34.45 | length 1847.5
  Top Layer w15: v1(6975.13,3996.95) U22.R3@6994.82,3977.26
  Mid-Layer 1 w7: v1(6295,5004) 6255,5004 6199,4948 6199,4560.77 6394.77,4365 6753.08,4365 6955.79,4162.29 6955.79,4016.29 v1(6975.13,3996.95) ; 6279.69,5004 cw(c6279.69,4988.69) 6290.52,4999.52 ccw(c6279.69,4988.69) 6279.69,5004 ; 6279.69,5004 ccw(c6279.69,5019.31) 6290.52,5008.48 cw(c6279.69,5019.31) 6279.69,5004 ; 6964.3,4007.77 cw(c6953.48,3996.95) v1@6968.79,3996.95 ; 6964.3,4007.77 ccw(c6975.13,4018.6) v1@6975.13,4003.29 ; 6964.3,4007.77 cw(c6953.48,3996.95) v1@6968.79,3996.95 ; 6964.3,4007.77 ccw(c6975.13,4018.6) v1@6975.13,4003.29 ; 6964.3,4007.77 ccw(c6975.13,4018.6) v1@6975.13,4003.29 ; 6964.3,4007.77 cw(c6953.48,3996.95) v1@6968.79,3996.95
  Bottom Layer w10: v1(6295,5004) 6295.16,5004.16 U34.45@6355.94,5004.16 ; v1@6298.42,5000.58 cw(c6307.07,4991.93) 6307.07,5004.16 ccw(c6307.07,4991.93) v1@6298.42,5000.58 ; v1@6298.42,5007.42 ccw(c6306.31,5015.31) 6306.31,5004.16 cw(c6306.31,5015.31) v1@6298.42,5007.42
A8: U22.P1 U34.46 | length 1851
  Top Layer w15: v1(7014.5,4075.69) U22.P1@7034.19,4056
  Mid-Layer 2 w7: v1(6270,5030) 6179,4939 6179,4564.92 6304.41,4439.51 6309.01,4439.51 6358.51,4390.01 6358.51,4385.41 6386.92,4357 6795.54,4357 7014.5,4138.03 v1(7014.5,4075.69) ; 6259.17,5019.17 cw(c6270,5008.35) 6270,5023.66 ccw(c6270,5008.35) 6259.17,5019.17 ; 6259.17,5019.17 ccw(c6248.35,5030) 6263.66,5030 cw(c6248.35,5030) 6259.17,5019.17 ; v1@7010.02,4080.17 ccw(c6999.19,4091) 7014.5,4091 ; v1@7010.02,4080.17 ccw(c6999.19,4091) 7014.5,4091 ; v1@7010.02,4080.17 ccw(c6999.19,4091) 7014.5,4091 ; 7014.5,4091 ccw(c7029.82,4091) v1@7018.99,4080.17 ; 7014.5,4091 ccw(c7029.82,4091) v1@7018.99,4080.17 ; 7014.5,4091 ccw(c7029.82,4091) v1@7018.99,4080.17
  Bottom Layer w10: v1(6270,5030) 6270.25,5029.75 U34.46@6355.94,5029.75 ; v1@6273.42,5026.58 cw(c6281.08,5018.92) 6281.08,5029.75 ccw(c6281.08,5018.92) v1@6273.42,5026.58 ; v1@6273.42,5033.42 ccw(c6282.3,5042.3) 6282.3,5029.75 cw(c6282.3,5042.3) v1@6273.42,5033.42
A9: U22.P2 U34.47 | length 1932.1
  Top Layer w15: v1(7014.5,4036.32) U22.P2@7034.19,4016.63
  Mid-Layer 2 w7: v1(6295,5055) 6260,5055 6166,4961 6166,4559.54 6299.03,4426.51 6303.63,4426.51 6345.51,4384.63 6345.51,4380.03 6381.54,4344 6790.15,4344 6995.16,4138.99 6995.16,4056.34 7014.5,4037 v1(7014.5,4036.32) ; 6279.69,5055 cw(c6279.69,5039.69) 6290.52,5050.52 ccw(c6279.69,5039.69) 6279.69,5055 ; 6279.69,5055 ccw(c6279.69,5070.31) 6290.52,5059.48 cw(c6279.69,5070.31) 6279.69,5055 ; 7003.19,4048.31 cw(c6991.2,4036.32) v1@7008.16,4036.32 ; 7003.19,4048.31 cw(c6991.2,4036.32) v1@7008.16,4036.32 ; 7003.19,4048.31 cw(c6991.2,4036.32) v1@7008.16,4036.32 ; 7004.85,4046.66 ccw(c7014.5,4056.32) v1@7014.5,4042.66 ; 7004.85,4046.66 ccw(c7014.5,4056.32) v1@7014.5,4042.66 ; 7004.85,4046.66 ccw(c7014.5,4056.32) v1@7014.5,4042.66
  Bottom Layer w10: v1(6295,5055) 6295.34,5055.34 U34.47@6355.94,5055.34 ; v1@6298.42,5051.58 cw(c6307.51,5042.49) 6307.51,5055.34 ccw(c6307.51,5042.49) v1@6298.42,5051.58 ; v1@6298.42,5058.42 ccw(c6305.87,5065.87) 6305.87,5055.34 cw(c6305.87,5065.87) v1@6298.42,5058.42
A10: U22.R4 U34.48 | length 2026.7
  Top Layer w15: v1(6975.13,3957.57) U22.R4@6994.82,3937.89
  Mid-Layer 2 w7: v1(6270,5081) 6267.62,5081 6153,4966.38 6153,4554.15 6293.64,4413.51 6298.24,4413.51 6332.51,4379.24 6332.51,4374.64 6376.15,4331 6784.77,4331 6955.79,4159.98 6955.79,3976.92 v1(6975.13,3957.57) ; 6964.31,3968.4 cw(c6953.48,3957.57) v1@6968.79,3957.57 ; 6964.31,3968.4 ccw(c6975.13,3979.23) v1@6975.13,3963.92 ; 6964.31,3968.4 cw(c6953.48,3957.57) v1@6968.79,3957.57 ; 6964.31,3968.4 ccw(c6975.13,3979.23) v1@6975.13,3963.92 ; 6964.31,3968.4 ccw(c6975.13,3979.23) v1@6975.13,3963.92 ; 6964.31,3968.4 cw(c6953.48,3957.57) v1@6968.79,3957.57 ; 6255.1,5068.49 cw(c6270,5053.59) 6270,5074.66 ccw(c6270,5053.59) 6255.1,5068.49 ; 6260.86,5074.24 ccw(c6254.1,5081) 6263.66,5081 cw(c6254.1,5081) 6260.86,5074.24
  Bottom Layer w10: v1(6270,5081) 6270.07,5080.93 U34.48@6355.94,5080.93 ; v1@6273.42,5077.58 cw(c6281.52,5069.48) 6281.52,5080.93 ccw(c6281.52,5069.48) v1@6273.42,5077.58 ; v1@6273.42,5084.42 ccw(c6281.86,5092.86) 6281.86,5080.93 cw(c6281.86,5092.86) v1@6273.42,5084.42
A11: U22.T1 U34.49 | length 1863.6
  Top Layer w15: v1(6935.76,4075.69) U22.T1@6955.45,4056
  Mid-Layer 1 w7: v1(6295,5106) 6258,5106 6186,5034 6186,4555.38 6389.38,4352 6747.69,4352 6935.76,4163.93 v1(6935.76,4075.69) ; 6279.69,5106 cw(c6279.69,5090.69) 6290.52,5101.52 ccw(c6279.69,5090.69) 6279.69,5106 ; 6279.69,5106 ccw(c6279.69,5121.31) 6290.52,5110.48 cw(c6279.69,5121.31) 6279.69,5106 ; v1@6931.28,4080.17 ccw(c6920.45,4091) 6935.76,4091 ; v1@6931.28,4080.17 ccw(c6920.45,4091) 6935.76,4091 ; v1@6931.28,4080.17 ccw(c6920.45,4091) 6935.76,4091 ; 6935.76,4091 ccw(c6951.07,4091) v1@6940.25,4080.17 ; 6935.76,4091 ccw(c6951.07,4091) v1@6940.25,4080.17 ; 6935.76,4091 ccw(c6951.07,4091) v1@6940.25,4080.17
  Bottom Layer w10: v1(6295,5106) 6295.52,5106.52 U34.49@6355.94,5106.52 ; v1@6298.42,5102.58 cw(c6307.95,5093.05) 6307.95,5106.52 ccw(c6307.95,5093.05) v1@6298.42,5102.58 ; v1@6298.42,5109.42 ccw(c6305.44,5116.44) 6305.44,5106.52 cw(c6305.44,5116.44) v1@6298.42,5109.42
A12: U22.T2 U34.50 | length 1927.5
  Top Layer w15: v1(6935.76,4036.32) U22.T2@6955.45,4016.63
  Mid-Layer 1 w7: v1(6270,5132) 6265.62,5132 6173,5039.38 6173,4550 6384,4339 6742.31,4339 6916.42,4164.89 6916.42,4056.34 6935.76,4037 v1(6935.76,4036.32) ; 6924.45,4048.31 cw(c6912.45,4036.32) v1@6929.42,4036.32 ; 6924.45,4048.31 cw(c6912.45,4036.32) v1@6929.42,4036.32 ; 6924.45,4048.31 cw(c6912.45,4036.32) v1@6929.42,4036.32 ; 6926.1,4046.66 ccw(c6935.76,4056.32) v1@6935.76,4042.66 ; 6926.1,4046.66 ccw(c6935.76,4056.32) v1@6935.76,4042.66 ; 6926.1,4046.66 ccw(c6935.76,4056.32) v1@6935.76,4042.66 ; 6251.69,5118.07 cw(c6270,5099.76) 6270,5125.66 ccw(c6270,5099.76) 6251.69,5118.07
  Bottom Layer w10: v1@6270.11,5132.11 U34.50@6355.94,5132.11 ; v1@6273.42,5128.58 cw(c6281.96,5120.04) 6281.96,5132.11 ccw(c6281.96,5120.04) v1@6273.42,5128.58 ; v1@6273.42,5135.42 ccw(c6281.42,5143.42) 6281.42,5132.11 cw(c6281.42,5143.42) v1@6273.42,5135.42
A13: U22.A2 U34.80 | length 1736.3
  Top Layer w15: U22.A2@7546,4016.63 v1(7565.69,4036.32)
  Mid-Layer 1 w7: v1(7287,5245) 7287,5212 7585.03,4913.97 7585.03,4055.66 v1(7565.69,4036.32) ; 7287,5229.69 cw(c7302.31,5229.69) 7291.48,5240.52 ccw(c7302.31,5229.69) 7287,5229.69 ; 7287,5229.69 ccw(c7271.69,5229.69) 7282.52,5240.52 cw(c7271.69,5229.69) 7287,5229.69 ; v1@7565.69,4042.66 ccw(c7565.69,4057.97) 7576.51,4047.14 ; v1@7565.69,4042.66 ccw(c7565.69,4057.97) 7576.51,4047.14 ; v1@7565.69,4042.66 ccw(c7565.69,4057.97) 7576.51,4047.14 ; v1@7572.03,4036.32 cw(c7587.34,4036.32) 7576.51,4047.14 ; v1@7572.03,4036.32 cw(c7587.34,4036.32) 7576.51,4047.14 ; v1@7572.03,4036.32 cw(c7587.34,4036.32) 7576.51,4047.14
  Bottom Layer w10: U34.80@7161.06,5204.94 7161.06,5244.06 7178,5261 7271,5261 v1(7287,5245) ; v1@7282.16,5245 ccw(c7270.47,5245) 7278.73,5253.27 ccw(c7287,5261.53) v1@7287,5249.84 ; U34.80@7162.95,5232.5 cw(c7195.42,5232.5) 7172.46,5255.46 ccw(c7195.42,5232.5) U34.80@7162.95,5232.5
A14: U22.B3 U34.81 | length 1534.1
  Top Layer w15: U22.B3@7506.63,3977.26 v1(7526.32,3996.95)
  Mid-Layer 1 w7: v1(7310,5132) 7348.62,5132 7545.66,4934.96 7545.66,4016.29 v1(7526.32,3996.95) ; 7325.31,5132 cw(c7325.31,5147.31) 7314.48,5136.48 ccw(c7325.31,5147.31) 7325.31,5132 ; 7325.31,5132 ccw(c7325.31,5116.69) 7314.48,5127.52 cw(c7325.31,5116.69) 7325.31,5132 ; v1@7526.32,4003.29 ccw(c7526.32,4018.6) 7537.14,4007.77 ; v1@7526.32,4003.29 ccw(c7526.32,4018.6) 7537.14,4007.77 ; v1@7526.32,4003.29 ccw(c7526.32,4018.6) 7537.14,4007.77 ; v1@7532.66,3996.95 cw(c7547.97,3996.95) 7537.14,4007.77 ; v1@7532.66,3996.95 cw(c7547.97,3996.95) 7537.14,4007.77 ; v1@7532.66,3996.95 cw(c7547.97,3996.95) 7537.14,4007.77
  Bottom Layer w10: U34.81@7224.06,5132.11 7309.89,5132.11 v1(7310,5132) ; 7298.04,5132.11 cw(c7298.04,5120.04) 7306.58,5128.58 ccw(c7298.04,5120.04) 7298.04,5132.11 ; 7298.58,5132.11 ccw(c7298.58,5143.42) 7306.58,5135.42 cw(c7298.58,5143.42) 7298.58,5132.11
A15: U22.B1 U34.82 | length 1418.4
  Top Layer w15: U22.B1@7506.63,4056 v1(7526.32,4075.69)
  Mid-Layer 1 w7: v1(7287,5107) 7355.23,5107 7526.32,4935.91 v1(7526.32,4075.69) ; 7302.31,5107 cw(c7302.31,5122.31) 7291.48,5111.48 ccw(c7302.31,5122.31) 7302.31,5107 ; 7302.31,5107 ccw(c7302.31,5091.69) 7291.48,5102.52 cw(c7302.31,5091.69) 7302.31,5107 ; v1@7521.83,4080.17 ccw(c7511,4091) 7526.32,4091 ; v1@7521.83,4080.17 ccw(c7511,4091) 7526.32,4091 ; v1@7521.83,4080.17 ccw(c7511,4091) 7526.32,4091 ; 7526.32,4091 ccw(c7541.63,4091) v1@7530.8,4080.17 ; 7526.32,4091 ccw(c7541.63,4091) v1@7530.8,4080.17 ; 7526.32,4091 ccw(c7541.63,4091) v1@7530.8,4080.17
  Bottom Layer w10: U34.82@7224.06,5106.52 7286.52,5106.52 v1(7287,5107) ; 7274.15,5106.52 ccw(c7274.15,5119.85) 7283.58,5110.42 cw(c7274.15,5119.85) 7274.15,5106.52 ; 7276.47,5106.52 cw(c7276.47,5096.47) 7283.58,5103.58 ccw(c7276.47,5096.47) 7276.47,5106.52
A16: U22.C4 U34.83 | length 1517.9
  Top Layer w15: U22.C4@7467.26,3937.89 v1(7486.95,3957.58)
  Mid-Layer 1 w7: v1(7310,5081) 7362.85,5081 7506.97,4936.87 7506.97,3978.97 ; v1(7486.95,3957.58) 7506.97,3977.6 7506.97,3978.97 ; 7505,3977 7506.97,3978.97 ; 7325.31,5081 cw(c7325.31,5096.31) 7314.48,5085.48 ccw(c7325.31,5096.31) 7325.31,5081 ; 7325.31,5081 ccw(c7325.31,5065.69) 7314.48,5076.52 cw(c7325.31,5065.69) 7325.31,5081 ; v1@7486.95,3963.92 ccw(c7486.95,3979.23) 7497.77,3968.4 ; v1@7486.95,3963.92 ccw(c7486.95,3979.23) 7497.77,3968.4 ; v1@7486.95,3963.92 ccw(c7486.95,3979.23) 7497.77,3968.4 ; v1@7493.29,3957.58 cw(c7508.6,3957.58) 7497.77,3968.4 ; v1@7493.29,3957.58 cw(c7508.6,3957.58) 7497.77,3968.4 ; v1@7493.29,3957.58 cw(c7508.6,3957.58) 7497.77,3968.4
  Bottom Layer w10: U34.83@7224.06,5080.93 7309.93,5080.93 v1(7310,5081) ; 7298.14,5080.93 ccw(c7298.14,5092.86) 7306.58,5084.42 cw(c7298.14,5092.86) 7298.14,5080.93 ; 7298.48,5080.93 cw(c7298.48,5069.48) 7306.58,5077.58 ccw(c7298.48,5069.48) 7298.48,5080.93
A17: U22.F1 U34.99 | length 952.4
  Top Layer w15: U22.F1@7349.15,4056 v1(7368.84,4075.69)
  Mid-Layer 1 w7: v1(7310,4671) 7343,4671 7368.84,4645.16 v1(7368.84,4075.69) ; v1@7314.48,4666.52 cw(c7325.31,4655.69) 7325.31,4671 ; v1@7314.48,4666.52 cw(c7325.31,4655.69) 7325.31,4671 ; v1@7314.48,4666.52 cw(c7325.31,4655.69) 7325.31,4671 ; v1@7314.48,4675.48 ccw(c7325.31,4686.31) 7325.31,4671 ; v1@7314.48,4675.48 ccw(c7325.31,4686.31) 7325.31,4671 ; v1@7314.48,4675.48 ccw(c7325.31,4686.31) 7325.31,4671 ; v1@7364.35,4080.17 ccw(c7353.52,4091) 7368.84,4091 ; v1@7364.35,4080.17 ccw(c7353.52,4091) 7368.84,4091 ; v1@7364.35,4080.17 ccw(c7353.52,4091) 7368.84,4091 ; 7368.84,4091 ccw(c7384.15,4091) v1@7373.32,4080.17 ; 7368.84,4091 ccw(c7384.15,4091) v1@7373.32,4080.17 ; 7368.84,4091 ccw(c7384.15,4091) v1@7373.32,4080.17
  Bottom Layer w10: U34.99@7224.06,4671.48 7309.52,4671.48 v1(7310,4671) ; 7297.15,4671.48 cw(c7297.15,4658.15) v1@7306.58,4667.58 ; 7297.15,4671.48 cw(c7297.15,4658.15) v1@7306.58,4667.58 ; 7297.15,4671.48 cw(c7297.15,4658.15) v1@7306.58,4667.58 ; 7299.47,4671.48 ccw(c7299.47,4681.53) v1@7306.58,4674.42 ; 7299.47,4671.48 ccw(c7299.47,4681.53) v1@7306.58,4674.42 ; 7299.47,4671.48 ccw(c7299.47,4681.53) v1@7306.58,4674.42
A18: U22.E4 U34.100 | length 1059.9
  Top Layer w15: U22.E4@7388.52,3937.89 v1(7408.21,3957.58)
  Mid-Layer 2 w7: v1(7287,4646) 7340,4646 7388.86,4597.14 7388.86,3977.6 7408.21,3958.26 v1(7408.21,3957.58) ; v1@7291.48,4641.52 cw(c7302.31,4630.69) 7302.31,4646 ; v1@7291.48,4641.52 cw(c7302.31,4630.69) 7302.31,4646 ; v1@7291.48,4641.52 cw(c7302.31,4630.69) 7302.31,4646 ; v1@7291.48,4650.48 ccw(c7302.31,4661.31) 7302.31,4646 ; v1@7291.48,4650.48 ccw(c7302.31,4661.31) 7302.31,4646 ; v1@7291.48,4650.48 ccw(c7302.31,4661.31) 7302.31,4646 ; 7396.89,3969.57 cw(c7384.9,3957.58) v1@7401.86,3957.58 ; 7396.89,3969.57 cw(c7384.9,3957.58) v1@7401.86,3957.58 ; 7396.89,3969.57 cw(c7384.9,3957.58) v1@7401.86,3957.58 ; 7398.55,3967.92 ccw(c7408.21,3977.58) v1@7408.21,3963.92 ; 7398.55,3967.92 ccw(c7408.21,3977.58) v1@7408.21,3963.92 ; 7398.55,3967.92 ccw(c7408.21,3977.58) v1@7408.21,3963.92
  Bottom Layer w10: U34.100@7224.06,4645.89 7286.89,4645.89 v1(7287,4646) ; 7275.04,4645.89 ccw(c7275.04,4657.96) v1@7283.58,4649.42 ; 7275.04,4645.89 ccw(c7275.04,4657.96) v1@7283.58,4649.42 ; 7275.04,4645.89 ccw(c7275.04,4657.96) v1@7283.58,4649.42 ; 7275.58,4645.89 cw(c7275.58,4634.58) v1@7283.58,4642.58 ; 7275.58,4645.89 cw(c7275.58,4634.58) v1@7283.58,4642.58 ; 7275.58,4645.89 cw(c7275.58,4634.58) v1@7283.58,4642.58
A+5V: C109.1 C111.2 L35.2 N1.8 pad.0@5983,3088 | length 1414.6
  Top Layer w31.5: N1.8@5897,3113 5958,3113 pad.0@5983,3088 ; 5946.83,3100.1 ccw(c5969.32,3139.05) pad.0@5980.96,3095.61 ; N1.8@5903.64,3113 cw(c5903.64,3008.64) pad.0@5977.43,3082.43 ; N1.8@5903.64,3113 cw(c5903.64,3008.64) pad.0@5977.43,3082.43 ; N1.8@5903.64,3113 cw(c5903.64,3008.64) pad.0@5977.43,3082.43
  Bottom Layer w31.5: L35.2@5856.68,2722.62 cw(c5875.65,2682.14) 5907.25,2713.75 ; L35.2@5864,2707 5914,2707 ; 5864.38,2762 5864.38,2756.62 5914,2707 ; C111.2@5999,2707 5914,2707 ; 5898.41,2707 ccw(c5898.41,2672.59) 5874.08,2696.92 cw(c5898.41,2672.59) 5898.41,2707 ; 5898.41,2707 cw(c5898.41,2741.41) 5874.08,2717.08 ccw(c5898.41,2741.41) 5898.41,2707
  Bottom Layer w47.24: C109.1@5864.38,2980 5957,2980 5983,3006 pad.0@5983,3088 ; C109.1@5881.08,2963.3 cw(c5921.41,2922.97) 5921.41,2980 cw(c5921.41,3037.03) C109.1@5881.08,2996.7 ; C109.1@5881.89,2963.3 cw(c5922.22,2922.97) 5922.22,2980 cw(c5922.22,3037.03) C109.1@5881.89,2996.7
  Bottom Layer w59.06: L35.2@5864,2707 5864.38,2707.38 5864.38,2756.62 C109.1@5864.38,2980
A-5V: C44.1 C108.2 L6.1 L9.1 L15.1 L16.1 L20.2 L23.2 | length 1813
  Top Layer w31.5: L6.1@4540.37,2134 v4(4594,2134) ; v4(4871,2134) L9.1@4932.63,2134 ; v4(5555,2134) L15.1@5616.63,2134 ; v4@5766,3249 v4(5766.37,3248.63) L16.1@5766.37,3186 5767.37,3187 v9(5964,3187) 6028,3123 C44.1@6128,3123 6128,3042.37 L20.2@6127,3041.37 ; v4(6452,2665) 6476.63,2640.37 L23.2@6525,2640.37 ; 6494.1,2647.57 ccw(c6501.96,2676.87) L23.2@6517.13,2650.6 ; 4568.88,2134 ccw(c4568.88,2105.49) 4548.72,2125.65 cw(c4568.88,2105.49) 4568.88,2134 ; 4568.88,2134 cw(c4568.88,2162.51) 4548.72,2142.35 ccw(c4568.88,2162.51) 4568.88,2134 ; 4904.12,2134 ccw(c4904.12,2162.51) 4924.28,2142.35 cw(c4904.12,2162.51) 4904.12,2134 ; 4904.12,2134 cw(c4904.12,2105.49) 4924.28,2125.65 ccw(c4904.12,2105.49) 4904.12,2134 ; 5588.12,2134 ccw(c5588.12,2162.51) 5608.28,2142.35 cw(c5588.12,2162.51) 5588.12,2134 ; 5588.12,2134 cw(c5588.12,2105.49) 5608.28,2125.65 ccw(c5588.12,2105.49) 5588.12,2134 ; 5766.37,3216.48 ccw(c5794.88,3216.48) L16.1@5774.72,3196.32 ; 5766.37,3216.48 cw(c5737.86,3216.48) 5758.02,3196.32 ccw(c5737.86,3216.48) 5766.37,3216.48 ; 5766.37,3216.48 ccw(c5794.88,3216.48) L16.1@5774.72,3196.32 ; L16.1@5774.72,3196.32 ccw(c5797.22,3218.82) 5797.22,3187 cw(c5797.22,3218.82) L16.1@5774.72,3196.32 ; 5930.73,3187 cw(c5930.73,3153.73) 5954.26,3177.26 ccw(c5930.73,3153.73) 5930.73,3187 ; 5930.73,3187 ccw(c5930.73,3220.27) 5954.26,3196.74 cw(c5930.73,3220.27) 5930.73,3187 ; 5987.52,3163.48 cw(c6011.05,3187) 5977.78,3187 ccw(c6011.05,3187) 5987.52,3163.48 ; 5987.52,3163.48 ccw(c5964,3139.95) 5964,3173.22 cw(c5964,3139.95) 5987.52,3163.48 ; 6494.52,2640.37 ccw(c6494.52,2668.88) 6514.68,2648.72 cw(c6494.52,2668.88) 6494.52,2640.37 ; 6494.52,2640.37 cw(c6494.52,2611.86) 6514.68,2632.02 ccw(c6494.52,2611.86) 6494.52,2640.37 ; 6128,3072.22 ccw(c6159.82,3072.22) 6137.32,3049.72 cw(c6159.82,3072.22) 6128,3072.22 ; v4@6454.78,2667.78 ccw(c6520.97,2733.97) 6520.97,2640.37 cw(c6520.97,2733.97) v4@6454.78,2667.78
  Bottom Layer w59.06: C108.2@5873,3186 5963,3186 v9(5964,3187)
ACLK: U8.13 U17.4 | length 1857.9
  Top Layer w20: U17.4@5811.4,5215.48 U17.4@5812,5214.88
  Top Layer w23.62: v5(5044,4220) U8.13@5127.08,4220 ; v3@5811.4,5174.6 U17.4@5811.4,5215.48
  Mid-Layer 2 w7.87: v5@5032.19,4220 ccw(c5003.67,4220) 5023.84,4240.16 ccw(c5044,4260.33) v5@5044,4231.81 ; v5(5044,4220) 5001,4263 5001,4333 5064,4396 5064,5004 5105,5045 5603,5045 5645,5045 5774,5174 v3(5812,5174) ; v3@5804.18,5166.18 ccw(c5785.29,5147.29) 5785.29,5174 ccw(c5785.29,5200.71) v3@5804.18,5181.82
ACTLE: U9.11 U22.AB7 | length 2164.4
  Top Layer w11.81: U9.11@5186.8,4744.16 5254.84,4744.16 v12(5255,4744) ; 5240.36,4744.16 cw(c5240.36,4729.36) v12@5250.82,4739.82 ; 5240.36,4744.16 cw(c5240.36,4729.36) v12@5250.82,4739.82 ; 5240.36,4744.16 cw(c5240.36,4729.36) v12@5250.82,4739.82 ; 5241.12,4744.16 ccw(c5241.12,4757.88) v12@5250.82,4748.18 ; 5241.12,4744.16 ccw(c5241.12,4757.88) v12@5250.82,4748.18 ; 5241.12,4744.16 ccw(c5241.12,4757.88) v12@5250.82,4748.18
  Top Layer w15: v1(6699.54,3839.47) U22.AB7@6719.23,3819.78
  Mid-Layer 2 w7: v12(5255,4744) 5255,4718 6048,3925 6507,3925 6553,3879 6602,3879 6604.45,3876.55 6641.53,3839.47 v1(6699.54,3839.47) ; v12@5249.12,4738.12 cw(c5234.94,4723.94) 5255,4723.94 ; v12@5249.12,4738.12 cw(c5234.94,4723.94) 5255,4723.94 ; v12@5249.12,4738.12 cw(c5234.94,4723.94) 5255,4723.94 ; 5255,4723.94 cw(c5275.06,4723.94) v12@5260.88,4738.12 ; 5255,4723.94 cw(c5275.06,4723.94) v12@5260.88,4738.12 ; 5255,4723.94 cw(c5275.06,4723.94) v12@5260.88,4738.12 ; 6684.23,3839.47 cw(c6684.23,3824.15) v1@6695.06,3834.98 ; 6684.23,3839.47 ccw(c6684.23,3854.78) v1@6695.06,3843.95 ; 6684.23,3839.47 cw(c6684.23,3824.15) v1@6695.06,3834.98 ; 6684.23,3839.47 ccw(c6684.23,3854.78) v1@6695.06,3843.95 ; 6684.23,3839.47 ccw(c6684.23,3854.78) v1@6695.06,3843.95 ; 6684.23,3839.47 cw(c6684.23,3824.15) v1@6695.06,3834.98
AD8343_BUSY: U22.AB18 U36.13 | length 1584.5
  Top Layer w7: U36.13@5356.72,3678 5419,3678 v1(5420,3677) ; U36.13@5387.66,3675.6 cw(c5393.45,3669.82) 5393.45,3678 cw(c5393.45,3686.18) U36.13@5387.66,3680.4 ; 5402.27,3678 cw(c5402.27,3659.27) v1@5415.52,3672.52 ; 5407.1,3678 ccw(c5407.1,3689.9) v1@5415.52,3681.48
  Top Layer w15: v1(6699.54,3367.02) U22.AB18@6719.23,3386.71
  Mid-Layer 2 w7: v1(5420,3677) 5520,3677 5646,3551 6129,3551 6181,3499 6478,3499 6609.98,3367.02 v1(6699.54,3367.02) ; v1@5424.48,3672.52 cw(c5435.31,3661.69) 5435.31,3677 cw(c5435.31,3692.31) v1@5424.48,3681.48 ; v1@6695.06,3362.54 ccw(c6684.23,3351.71) 6684.23,3367.02 ccw(c6684.23,3382.33) v1@6695.06,3371.51
AD8343_CLK: U22.AB15 U36.16 | length 1579.6
  Top Layer w7: U36.16@5356.72,3753 v1(5420,3753) ; U36.16@5387.66,3750.6 cw(c5393.45,3744.82) 5393.45,3753 cw(c5393.45,3761.18) U36.16@5387.66,3755.4 ; v1@5415.52,3748.52 ccw(c5404.69,3737.69) 5404.69,3753 ccw(c5404.69,3768.31) v1@5415.52,3757.48
  Top Layer w15: v1(6699.54,3485.13) U22.AB15@6719.23,3504.82
  Mid-Layer 2 w7: v1(5420,3753) 5516,3753 5542,3727 5591,3727 ; v1@5424.48,3748.52 cw(c5435.31,3737.69) 5435.31,3753 cw(c5435.31,3768.31) v1@5424.48,3757.48 ; 5604,3727 5591,3727 ; v1@6695.06,3480.65 ccw(c6684.23,3469.82) 6684.23,3485.13 ccw(c6684.23,3500.44) v1@6695.06,3489.62 ; v1(6699.54,3485.13) 6569.87,3485.13 6489,3566 6335,3566 6201,3700 5777,3700 5750,3727 5591,3727
AD8343_CS: U22.AB16 U36.15 | length 1572.6
  Top Layer w7: U36.15@5356.72,3728 5420,3728 v1(5421,3727) ; U36.15@5387.66,3725.6 cw(c5393.45,3719.82) 5393.45,3728 cw(c5393.45,3736.18) U36.15@5387.66,3730.4 ; 5403.27,3728 cw(c5403.27,3709.27) v1@5416.52,3722.52 ; 5408.1,3728 ccw(c5408.1,3739.9) v1@5416.52,3731.48
  Top Layer w15: v1(6699.54,3445.76) U22.AB16@6719.23,3465.45
  Mid-Layer 2 w7: v1(5421,3727) 5516,3727 5531,3712 5746.62,3712 5771.62,3687 6190,3687 6329,3548 6485,3548 6564,3469 6676.3,3469 v1(6699.54,3445.76) ; v1@5425.48,3722.52 cw(c5436.31,3711.69) 5436.31,3727 cw(c5436.31,3742.31) v1@5425.48,3731.48 ; v1@6693.2,3445.76 ccw(c6677.89,3445.76) 6688.71,3456.59 ccw(c6699.54,3467.42) v1@6699.54,3452.1
AD8343_DI: U22.AB17 U36.14 | length 1578.5
  Top Layer w7: U36.14@5356.72,3703 5435,3703 v1(5436,3702) ; U36.14@5387.66,3700.6 cw(c5393.45,3694.82) 5393.45,3703 cw(c5393.45,3711.18) U36.14@5387.66,3705.4 ; 5418.27,3703 cw(c5418.27,3684.27) v1@5431.52,3697.52 ; 5423.1,3703 ccw(c5423.1,3714.9) v1@5431.52,3706.48
  Top Layer w15: v1(6699.54,3406.39) U22.AB17@6719.23,3426.08
  Mid-Layer 2 w7: v1(5436,3702) 5522.62,3702 5550.62,3674 6181,3674 6329,3526 6479,3526 6598.61,3406.39 v1(6699.54,3406.39) ; v1@5440.48,3697.52 cw(c5451.31,3686.69) 5451.31,3702 cw(c5451.31,3717.31) v1@5440.48,3706.48 ; v1@6695.06,3401.91 ccw(c6684.23,3391.08) 6684.23,3406.39 ccw(c6684.23,3421.7) v1@6695.06,3410.88
AD8343_DO: U22.AB19 U36.12 | length 1590.4
  Top Layer w7: U36.12@5356.72,3653 v1(5436,3653) ; U36.12@5387.66,3650.6 cw(c5393.45,3644.82) 5393.45,3653 cw(c5393.45,3661.18) U36.12@5387.66,3655.4 ; v1@5431.52,3648.52 ccw(c5420.69,3637.69) 5420.69,3653 ccw(c5420.69,3668.31) v1@5431.52,3657.48
  Top Layer w15: v1(6699.54,3327.65) U22.AB19@6719.23,3347.34
  Mid-Layer 2 w7: v1(5436,3653) 5514,3653 5630.66,3536.34 6050.66,3536.34 6125.76,3461.24 6474.76,3461.24 6588,3348 6679.19,3348 v1(6699.54,3327.65) ; v1@5440.48,3648.52 cw(c5451.31,3637.69) 5451.31,3653 cw(c5451.31,3668.31) v1@5440.48,3657.48 ; v1@6693.2,3327.65 ccw(c6677.89,3327.65) 6688.71,3338.48 ccw(c6699.54,3349.31) v1@6699.54,3333.99